# EAGLE board Central Board (EAGLE 8.3.0)
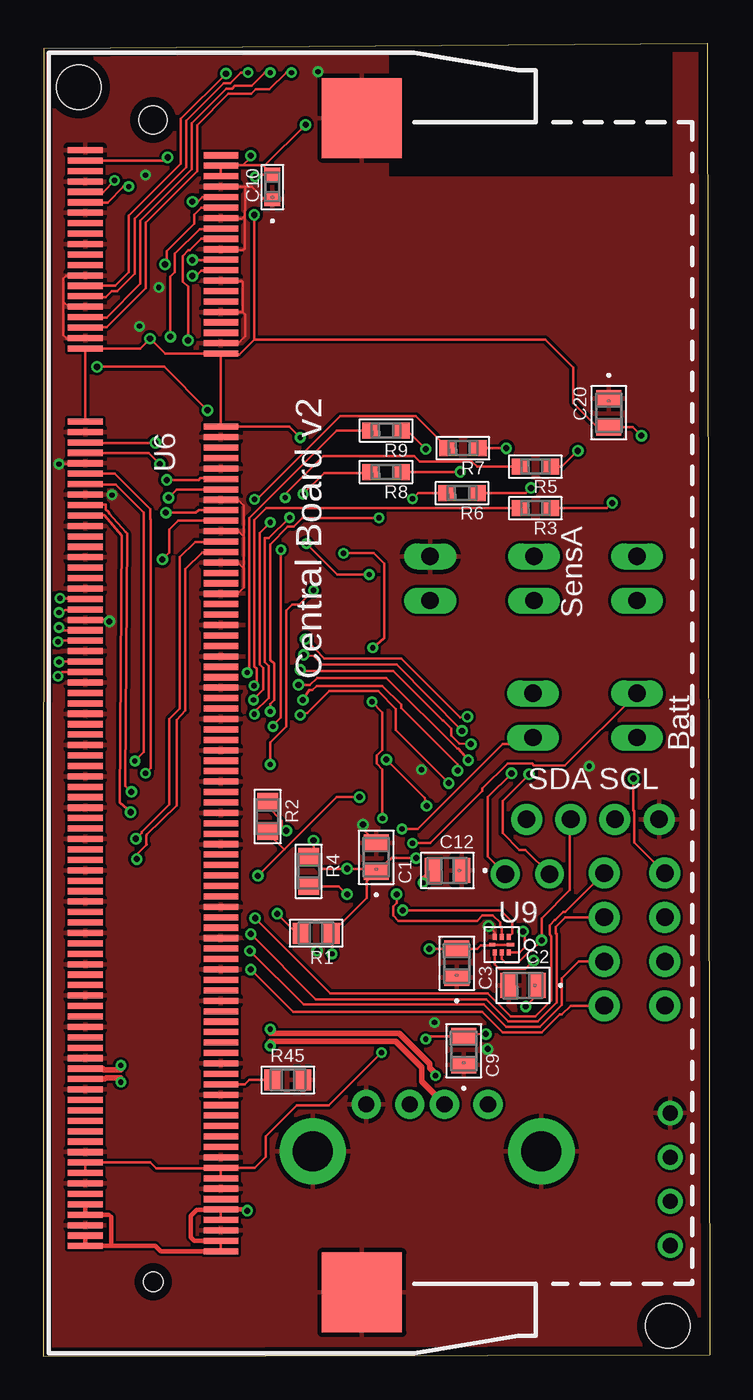
[diagram p0: board, top side]
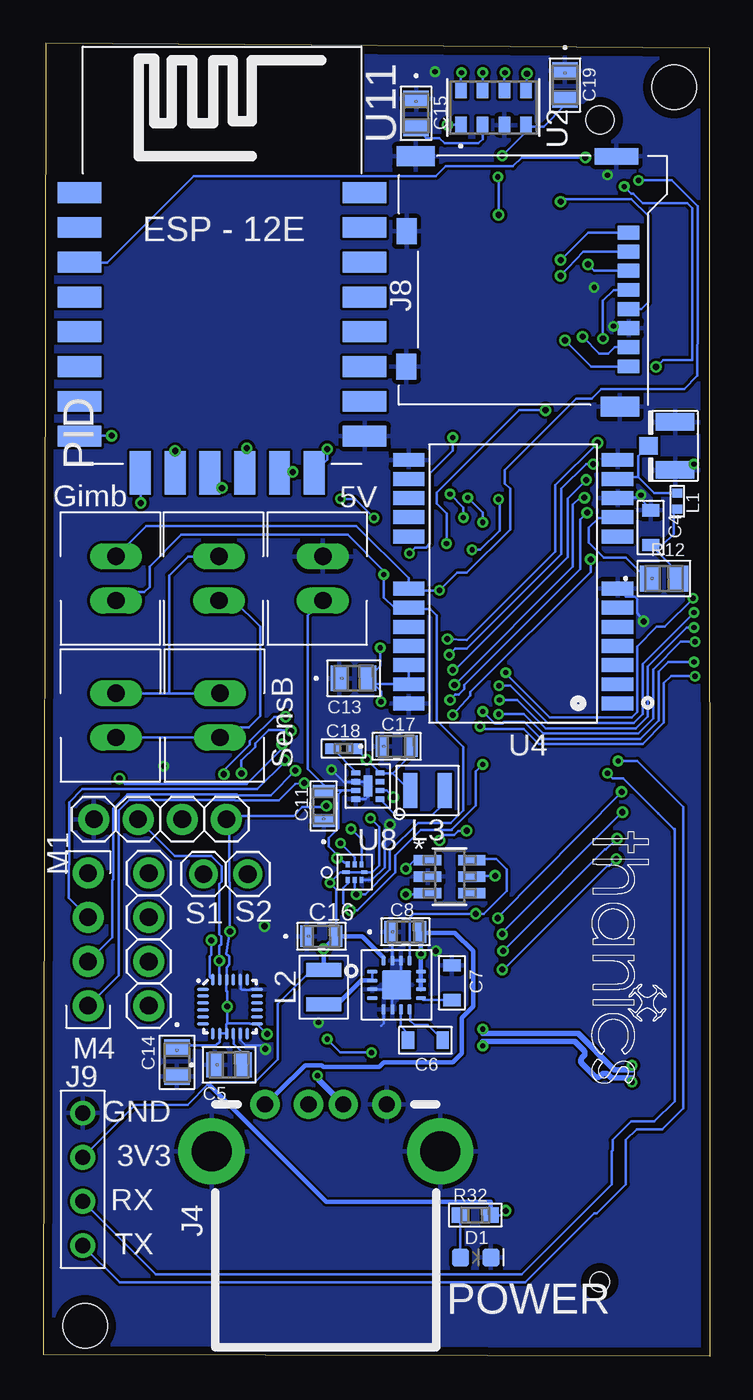
[diagram p1: board, bottom side, seen from below]

Size 38.28 x 75.46 mm. Coordinates in mm from the lower left corner, seen from the top.
Outline: 0,0 38.28,0.08 38.15,75.46 0.03,75.18 0,0
Copper layers (1*16): Top 0.035mm / dielectric 1.6mm / Bottom 0.035mm
Design rules "Elecrow_2-layer_PCB_eagle_rule *": minimum track width 6mil, minimum drill 12mil, track to track 6mil, track to pad 6mil, pad to pad 6mil, via to via 8mil, smd to smd 0mil, copper to edge 20mil, drill to drill 10mil, minimum pad ring 6mil, minimum via ring 6mil, stop-mask expansion 0mil, vias tented up to drill 100mil, thermal gap 10mil
Holes 2.54 mm at 35.89,1.73 2.03,72.95

## Footprints (pad centres in the part's own frame; a part is rotated, then mirrored left to right if it is on the bottom)
0805 = smd 0.965 x 1.448: 1 -0.826,0; 2 0.826,0
0603_CAPACITOR = smd 0.701 x 1.001: 1 -1.001,0; 2 1.001,0
G-21 = smd 0.711 x 1.245: 1 -0.851,0; 2 0.851,0
G-188-M = smd 0.813 x 0.914: 1 -0.699,0; 2 0.699,0
YAG_CC0805 = smd 0.965 x 1.448: 1 -0.826,0; 2 0.826,0
CC0402N-M = smd 0.864 x 0.61: 1 -0.635,0; 2 0.635,0
LED-0603 = smd 1 x 1: A -0.877,0; C 0.877,0
XH_CONNECTOR = drill 1.001 long: 1 -1.27,0; 2 1.27,0
USB_A_RECEPT = drill 0.92 pad 1.676: 1 -3.5,0; 2 -1,0; 3 1,0; 4 3.5,0 | drill 2.3 pad 3.81: 5 -6.57,-2.71; 6 6.57,-2.71
U.FL = smd 2.2 x 1: P$1 0,1.375; P$2 0,-1.375 | smd 1.05 x 1: P$3 1.525,0
MICROSD = smd 0.8 x 1.24: 1 -4.4,0; 2 -3.3,0; 3 -2.2,0; 4 -1.1,0; 5 0,0; 6 1.1,0; 7 2.2,0; 8 3.3,0 | smd 0.95 x 2.5: 9 -8.775,-0.7 | smd 1.15 x 2.2: 10 5.615,-0.5; 11 -8.775,-12.23 | smd 1.5 x 1.15: 12 -4.47,-12.755; 13 3.31,-12.775
4_PIN_TELE_CONNECTOR = drill 0.87 pad 1.422: 1 0,3.81; 2 0,1.27; 3 0,-1.27; 4 0,-3.81
1X02 = drill 1.016 pad 1.651: 1 -1.27,0; 2 1.27,0
1X04 = drill 1.016 pad 1.778: 1 -3.81,0; 2 -1.27,0; 3 1.27,0; 4 3.81,0
0402_INDUCTOR = smd 0.525 x 0.55: P$1 -0.463,0; P$2 0.463,0
470NH_INDUCTOR = smd 0.8 x 2: P$1 -1,0; P$2 1,0
RC0805N = smd 1.006 x 1.2: 1 -0.853,0; 2 0.853,0
RC0603N-M = smd 0.965 x 0.914: 1 -0.876,0; 2 0.876,0
STA_RNCP0805-M = smd 1.118 x 1.499: 1 -0.826,0; 2 0.826,0
QFN40P300X300X105-25N = smd 0.7 x 0.2: 1 -1.55,1; 2 -1.55,0.6; 3 -1.55,0.2; 4 -1.55,-0.2; 5 -1.55,-0.6; 6 -1.55,-1; 13 1.55,-1; 14 1.55,-0.6; 15 1.55,-0.2; 16 1.55,0.2; 17 1.55,0.6; 18 1.55,1 | smd 0.2 x 0.7: 7 -1,-1.55; 8 -0.6,-1.55; 9 -0.2,-1.55; 10 0.2,-1.55; 11 0.6,-1.55; 12 1,-1.55; 19 1,1.55; 20 0.6,1.55; 21 0.2,1.55; 22 -0.2,1.55; 23 -0.6,1.55; 24 -1,1.55
LGA8-M = smd 0.94 x 0.66: 1 -1.003,1.875; 2 -1.003,0.625; 3 -1.003,-0.625; 4 -1.003,-1.875; 5 1.003,-1.875; 6 1.003,-0.625; 7 1.003,0.625; 8 1.003,1.875
MF06A-M = smd 1.575 x 0.584: 1 -1.27,0.953; 2 -1.27,0; 3 -1.27,-0.953; 4 1.27,-0.953; 5 1.27,0; 6 1.27,0.953
NEO-M8 = smd 1.8 x 0.8: 1 6.4,-7.4; 2 6.4,-6.3; 3 6.4,-5.2; 4 6.4,-4.1; 5 6.4,-3; 6 6.4,-1.9; 7 6.4,-0.8; 8 6.4,2.2; 9 6.4,3.3; 10 6.4,4.4; 11 6.4,5.5; 12 6.4,6.6; 13 -5.6,6.6; 14 -5.6,5.5; 15 -5.6,4.4; 16 -5.6,3.3; 17 -5.6,2.2; 18 -5.6,-0.8; 19 -5.6,-1.9; 20 -5.6,-3; 21 -5.6,-4.1; 22 -5.6,-5.2; 23 -5.6,-6.3; 24 -5.6,-7.4
VQFN16 = smd 0.6 x 0.24: 1 -1.4,0.75; 2 -1.4,0.25; 3 -1.4,-0.25; 4 -1.4,-0.75; 9 1.4,-0.75; 10 1.4,-0.25; 11 1.4,0.25; 12 1.4,0.75 | smd 0.24 x 0.6: 5 -0.75,-1.4; 6 -0.25,-1.4; 7 0.25,-1.4; 8 0.75,-1.4; 13 0.75,1.4; 14 0.25,1.4; 15 -0.25,1.4; 16 -0.75,1.4 | smd 1.68 x 1.68: 17 0,0
SO-DIMM = smd 0.35 x 2: 1 -26.4,-3.9; 2 -26.1,3.9; 3 -25.8,-3.9; 4 -25.5,3.9; 5 -25.2,-3.9; 6 -24.9,3.9; 7 -24.6,-3.9; 8 -24.3,3.9; 9 -24,-3.9; 10 -23.7,3.9; 11 -23.4,-3.9; 12 -23.1,3.9; 13 -22.8,-3.9; 14 -22.5,3.9; 15 -22.2,-3.9; 16 -21.9,3.9; 17 -21.6,-3.9; 18 -21.3,3.9; 19 -21,-3.9; 20 -20.7,3.9; 21 -20.4,-3.9; 22 -20.1,3.9; 23 -19.8,-3.9; 24 -19.5,3.9; 25 -19.2,-3.9; 26 -18.9,3.9; 27 -18.6,-3.9; 28 -18.3,3.9; 29 -18,-3.9; 30 -17.7,3.9; 31 -17.4,-3.9; 32 -17.1,3.9; 33 -16.8,-3.9; 34 -16.5,3.9; 35 -16.2,-3.9; 36 -15.9,3.9; 37 -15.6,-3.9; 38 -15.3,3.9; 39 -15,-3.9; 40 -14.7,3.9; 41 -10.8,-3.9; 42 -10.5,3.9; 43 -10.2,-3.9; 44 -9.9,3.9; 45 -9.6,-3.9; 46 -9.3,3.9; 47 -9,-3.9; 48 -8.7,3.9; 49 -8.4,-3.9; 50 -8.1,3.9; 51 -7.8,-3.9; 52 -7.5,3.9; 53 -7.2,-3.9; 54 -6.9,3.9; 55 -6.6,-3.9; 56 -6.3,3.9; 57 -6,-3.9; 58 -5.7,3.9; 59 -5.4,-3.9; 60 -5.1,3.9; 61 -4.8,-3.9; 62 -4.5,3.9; 63 -4.2,-3.9; 64 -3.9,3.9; 65 -3.6,-3.9; 66 -3.3,3.9; 67 -3,-3.9; 68 -2.7,3.9; 69 -2.4,-3.9; 70 -2.1,3.9; 71 -1.8,-3.9; 72 -1.5,3.9; 73 -1.2,-3.9; 74 -0.9,3.9; 75 -0.6,-3.9; 76 -0.3,3.9; 77 0,-3.9; 78 0.3,3.9; 79 0.6,-3.9; 80 0.9,3.9; 81 1.2,-3.9; 82 1.5,3.9; 83 1.8,-3.9; 84 2.1,3.9; 85 2.4,-3.9; 86 2.7,3.9; 87 3,-3.9; 88 3.3,3.9; 89 3.6,-3.9; 90 3.9,3.9; 91 4.2,-3.9; 92 4.5,3.9; 93 4.8,-3.9; 94 5.1,3.9; 95 5.4,-3.9; 96 5.7,3.9; 97 6,-3.9; 98 6.3,3.9; 99 6.6,-3.9; 100 6.9,3.9; 101 7.2,-3.9; 102 7.5,3.9; 103 7.8,-3.9; 104 8.1,3.9; 105 8.4,-3.9; 106 8.7,3.9; 107 9,-3.9; 108 9.3,3.9; 109 9.6,-3.9; 110 9.9,3.9; 111 10.2,-3.9; 112 10.5,3.9; 113 10.8,-3.9; 114 11.1,3.9; 115 11.4,-3.9; 116 11.7,3.9; 117 12,-3.9; 118 12.3,3.9; 119 12.6,-3.9; 120 12.9,3.9; 121 13.2,-3.9; 122 13.5,3.9; 123 13.8,-3.9; 124 14.1,3.9; 125 14.4,-3.9; 126 14.7,3.9; 127 15,-3.9; 128 15.3,3.9; 129 15.6,-3.9; 130 15.9,3.9; 131 16.2,-3.9; 132 16.5,3.9; 133 16.8,-3.9; 134 17.1,3.9; 135 17.4,-3.9; 136 17.7,3.9; 137 18,-3.9; 138 18.3,3.9; 139 18.6,-3.9; 140 18.9,3.9; 141 19.2,-3.9; 142 19.5,3.9; 143 19.8,-3.9; 144 20.1,3.9; 145 20.4,-3.9; 146 20.7,3.9; 147 21,-3.9; 148 21.3,3.9; 149 21.6,-3.9; 150 21.9,3.9; 151 22.2,-3.9; 152 22.5,3.9; 153 22.8,-3.9; 154 23.1,3.9; 155 23.4,-3.9; 156 23.7,3.9; 157 24,-3.9; 158 24.3,3.9; 159 24.6,-3.9; 160 24.9,3.9; 161 25.2,-3.9; 162 25.5,3.9; 163 25.8,-3.9; 164 26.1,3.9; 165 26.4,-3.9; 166 26.7,3.9; 167 27,-3.9; 168 27.3,3.9; 169 27.6,-3.9; 170 27.9,3.9; 171 28.2,-3.9; 172 28.5,3.9; 173 28.8,-3.9; 174 29.1,3.9; 175 29.4,-3.9; 176 29.7,3.9; 177 30,-3.9; 178 30.3,3.9; 179 30.6,-3.9; 180 30.9,3.9; 181 31.2,-3.9; 182 31.5,3.9; 183 31.8,-3.9; 184 32.1,3.9; 185 32.4,-3.9; 186 32.7,3.9; 187 33,-3.9; 188 33.3,3.9; 189 33.6,-3.9; 190 33.9,3.9; 191 34.2,-3.9; 192 34.5,3.9; 193 34.8,-3.9; 194 35.1,3.9; 195 35.4,-3.9; 196 35.7,3.9; 197 36,-3.9; 198 36.3,3.9; 199 36.6,-3.9; 200 36.9,3.9 | smd 4.6 x 4.6: G1 -28.254,12; G2 39.27,12 | hole 1.6: -28.15,0 | hole 1.1: 38.65,0
MLF(ML)_8PIN = smd 0.5 x 0.3: 1 -0.7,0.75; 2 -0.7,0.25; 3 -0.7,-0.25; 4 -0.7,-0.75; 5 0.7,-0.75; 6 0.7,-0.25; 7 0.7,0.25; 8 0.7,0.75 | smd 0.5 x 1.2: EP 0,0
8-UMLP = smd 0.45 x 0.22: 1 -0.5,0 | smd 0.22 x 0.35: 2 -0.4,-0.45; 3 0,-0.45; 4 0.4,-0.45; 6 0.4,0.45; 7 0,0.45; 8 -0.4,0.45 | smd 0.35 x 0.22: 5 0.55,0
ESP12E-SMD = smd 2.5 x 1.2: ADC -8.3,3.8; CH_PD -8.3,1.8; GND 8.1,-8.2; GPIO0 8.1,-2.2; GPIO2 8.1,-4.2; GPIO4 8.1,-0.2; GPIO5 8.1,1.8; GPIO12 -8.3,-4.2; GPIO13 -8.3,-6.2; GPIO14 -8.3,-2.2; GPIO15 8.1,-6.2; GPIO16 -8.3,-0.2; RESET -8.3,5.8; RXD0 8.1,3.8; TXD0 8.1,5.8; VCC -8.3,-8.2 | smd 1.2 x 2.5: CS0 -4.8,-10.3; GPIO9 -0.8,-10.3; GPIO10 1.2,-10.3; MISO -2.8,-10.3; MOSI 3.2,-10.3; SCLK 5.2,-10.3
4_PIN_CONNECTOR = drill 1 pad 1.778: 1 0,3.81; 2 0,1.27; 3 0,-1.27; 4 0,-3.81

## Placement (x,y rotation side)
C1  0.1uF  [0805]  19.13,28.68 90 top
C2  0.1uF  [0805]  27.56,21.31 180 top
C3  0.1uF  [0805]  23.75,22.58 90 top
C4  10nF  [0603_CAPACITOR]  3.38,47.62 270 bottom
C5  0.1uF  [0805]  27.61,16.74 0 bottom
C6  10nF  [0603_CAPACITOR]  16.33,18.16 180 bottom
C7  10nF  [0603_CAPACITOR]  14.81,21.46 270 bottom
C8  10uF  [G-21]  17.48,24.38 0 bottom
C9  0.1uF  [0805]  24.16,17.55 90 top
C10  2.2uF  [G-188-M]  13.16,67.21 90 top
C11  10uF  [G-21]  22.17,31.62 90 bottom
C12  0.1uF  [0805]  23.22,27.91 180 top
C13  0.1uF  [0805]  20.45,38.96 0 bottom
C14  0.1uF  [0805]  30.61,16.89 270 bottom
C15  1uF  [YAG_CC0805]  16.87,71.45 270 bottom
C16  22uF  [G-21]  22.3,24.13 0 bottom
C17  10uF  [G-21]  17.98,35.05 0 bottom
C18  560pF  [CC0402N-M]  21.03,34.92 0 bottom
C19  1uF  [YAG_CC0805]  8.31,73.08 270 bottom
C20  0.1uF  [0805]  32.49,54.23 270 top
D1  GREEN  [LED-0603]  13.44,5.66 0 bottom
J1  POWER_CONNECTOR  [XH_CONNECTOR]  22.23,44.7 90 bottom
J2  I2C_CONNECTOR  [XH_CONNECTOR]  28.19,44.7 90 bottom
J3  I2C_CONNECTOR  [XH_CONNECTOR]  34.11,36.83 90 bottom
J4  USB_A_RECEPT  [USB_A_RECEPT]  22.05,14.48 0 bottom
J5  U.FL  [U.FL]  1.98,52.32 180 bottom
J6  I2C_CONNECTOR  [XH_CONNECTOR]  28.14,36.83 90 bottom
J7  I2C_CONNECTOR  [XH_CONNECTOR]  34.11,44.7 90 bottom
J8  MICROSD  [MICROSD]  4.65,60.2 270 bottom
J9  4_PIN_TELE_CONNECTOR  [4_PIN_TELE_CONNECTOR]  36.02,10.16 180 bottom
JP1  [1X02]  27.81,27.71 0 bottom
JP2  [1X04]  32.23,23.95 270 bottom
JP3  [1X04]  31.57,30.86 180 bottom
L1  27 nH  [0402_INDUCTOR]  1.85,49.15 270 bottom
L2  470nH  [470NH_INDUCTOR]  22.17,21.21 90 bottom
L3  470nH  [470NH_INDUCTOR]  16.21,32.51 180 bottom
R1  10k  [RC0805N]  15.67,24.31 180 top
R2  10k  [RC0805N]  12.88,31.01 270 top
R3  20R  [RC0603N-M]  28.27,48.74 180 top
R4  10k  [RC0805N]  15.24,27.86 270 top
R5  20R  [RC0603N-M]  28.27,51.13 180 top
R6  20R  [RC0603N-M]  24.05,49.61 180 top
R7  20R  [RC0603N-M]  24.1,52.2 180 top
R8  20R  [RC0603N-M]  19.69,50.83 180 top
R9  20R  [RC0603N-M]  19.69,53.21 180 top
R12  10  [STA_RNCP0805-M]  2.62,44.7 0 bottom
R32  20R  [RC0603N-M]  13.46,8.1 0 bottom
R45  10k  [RC0805N]  14.05,15.88 0 top
U1  [QFN40P300X300X105-25N]  27.56,20.09 0 bottom
U2  [LGA8-M]  12.42,71.78 90 bottom
U3  LM3880MF-1AA/NOPBMF06A-M  [MF06A-M]  14.94,27.56 0 bottom
U4  NEO-M8  [NEO-M8]  11.68,44.92 0 bottom
U5  TPS6209  [VQFN16]  17.98,21.34 0 bottom
U6  [SO-DIMM]  6.3,42.93 270 top
U7  MIC23050  [MLF(ML)_8PIN]  19.63,32.77 180 bottom
U8  [8-UMLP]  20.4,27.81 0 bottom
U9  [8-UMLP]  26.34,23.65 180 top
U11  [ESP12E-SMD]  27.91,61.09 0 bottom
U$12  4_PIN_CONNECTOR  [4_PIN_CONNECTOR]  35.71,23.95 0 bottom

## Library data of the parts
C1-C3 C5 C9 C12-C14 C20 = 0.1uF X7R Ceramic Capacitor; COPYRIGHT: Copyright C 2015 Accelerated Designs. All rights reserved; MANUFACTURER_PART_NUMBER: 08055C104KAT2A; VENDOR: Vendor
C4 C6 C7 J1-J4 J6-J9 L1-L3 U5 U7-U9 U$12 = thanics_robotics
C8 C11 C17 = 10uF X5R Ceramic Capacitor; COPYRIGHT: Copyright C 2015 Accelerated Designs. All rights reserved; MANUFACTURER_PART_NUMBER: GRM21BR60J106ME19L; VENDOR: Vendor
C10 = 2.2uF X5R Capacitor; COPYRIGHT: Copyright C 2015 Accelerated Designs. All rights reserved; MANUFACTURER_PART_NUMBER: GRM188R61C225KE15J; VENDOR: Vendor
C15 C19 = 1uF X7R Ceramic Capacitor; COPYRIGHT: Copyright C 2015 Accelerated Designs. All rights reserved; MANUFACTURER_PART_NUMBER: CC0805KKX7R7BB105; VENDOR: Vendor
C16 = 22uF X5R Ceramic Capacitor; COPYRIGHT: Copyright C 2015 Accelerated Designs. All rights reserved; MANUFACTURER_PART_NUMBER: GRM21BR60J226ME39L; VENDOR: Vendor
C18 = 560pF-capacitor; MANUFACTURER_PART_NUMBER: CC0402KRX7R9BB561; VENDOR: Yageo
D1 = SparkFun-LED; PROD_ID: DIO-00821
J5 = SparkFun-Connectors; PROD_ID: CONN-09193; SF_ID: WRL-09144
JP1-JP3 = pinhead
R1 R2 R4 R45 = 10k-resistor; CASE: 0805 2012 metric; COMPOSITION: Thin Film; COPYRIGHT: Copyright C 2015 Accelerated Designs. All rights reserved; DATASHEET: httpindustrial.panasonic.comwwwcgijvcr13pz.cgi?E+PZ+3+AOA0026+ERA6AEB103V+7+WW; DIGIKEYPARTNUMBER: P10KDATRND; HEIGHT: 0.024" 0.60mm; LEADSTYLE: Surface Mount SMD SMT; MANUFACTURER_PART_NUMBER: ERA6AEB103V; NUMBEROFTERMINATIONS: 2; PACKAGECASE: 0805 2012 Metric; PACKAGING: Tape &amp Reel TR; POWERWATTS: 0.125W 18W; QUANTITY_AVAILABLE: 225000; RESISTANCEINOHMS: 10.0K; RESISTANCEOHMS: 10K; SIZEDIMENSION: 0.079" L x 0.049" W 2.00mm x 1.25mm; TEMPERATURECOEFFICIENT: 25ppm°C; TOLERANCE: 0.1%; VENDOR: Panasonic; VOLTAGEWORKING: 100V
R3 R5-R9 R32 = 20-resistor; MANUFACTURER_PART_NUMBER: RC0603JR0720RL; VENDOR: Yageo
R12 = 10-resistor; COPYRIGHT: Copyright C 2015 Accelerated Designs. All rights reserved; MANUFACTURER_PART_NUMBER: RNCP0805FTD10R0; VENDOR: Vendor
U1 = ICM-20948-mpu
U2 = mpl115a1-barometer; MANUFACTURER_PART_NUMBER: mpl115a1; VENDOR: Freescale
U3 = LM3880MF; MANUFACTURER_PART_NUMBER: lm3880mf1aaNOPB; VENDOR: National Semiconductor
U4 = ubloxLib
U6 = raspberrypi_cm
U11 = esp8266modules

## Nets
1.8V: C2.1 C9.2 C14.1 C17.2 C18.2 JP3.1 L3.P$2 U1.8 U1.9 U1.13 U1.22 U6.183 U6.184 U6.185 U6.186 U7.4 U9.8
+3V3: C3.2 C10.2 C12.2 C13.2 C16.2 C19.2 C20.2 J8.4 J9.3 L2.P$2 R32.2 U2.1 U2.4 U4.22 U4.23 U5.16 U6.4 U6.6 U6.39 U6.40 U6.41 U6.42 U6.191 U6.192 U6.193 U6.194 U6.197 U6.198 U6.199 U6.200 U8.1 U8.5 U9.1 U9.5 U11.VCC
+5V: C1.1 C8.2 C11.2 J1.1 J4.1 R1.1 R2.1 R4.1 U3.1 U5.10 U5.11 U5.12 U7.7 U8.8
EMMC_DISABLE_N: U6.2
GND: C1.2 C2.2 C3.1 C4.1 C5.1 C7.1 C8.1 C9.1 C10.1 C11.1 C12.1 C13.1 C14.2 C15.1 C16.1 C17.1 C19.1 C20.1 D1.C J1.2 J4.4 J4.5 J4.6 J5.P$1 J5.P$2 J8.6 J8.9 J8.10 J8.11 J8.12 J8.13 J9.4 JP3.4 R45.2 U1.11 U1.18 U1.20 U2.3 U3.2 U4.7 U4.10 U4.12 U4.13 U4.24 U5.3 U5.5 U5.6 U5.14 U5.15 U5.17 U6.1 U6.7 U6.8 U6.13 U6.14 U6.19 U6.20 U6.25 U6.26 U6.31 U6.32 U6.37 U6.38 U6.43 U6.44 U6.49 U6.50 U6.55 U6.56 U6.61 U6.62 U6.67 U6.68 U6.73 U6.74 U6.79 U6.80 U6.85 U6.86 U6.91 U6.92 U6.97 U6.98 U6.103 U6.104 U6.109 U6.110 U6.115 U6.116 U6.121 U6.122 U6.127 U6.133 U6.134 U6.139 U6.140 U6.145 U6.146 U6.151 U6.152 U6.157 U6.163 U6.164 U6.169 U6.170 U6.181 U6.182 U6.187 U6.188 U6.195 U6.196 U6.G1 U6.G2 U7.6 U7.8 U7.EP U8.4 U9.4 U11.GND
I2C_SCL: J7.1 U4.19 U6.11 U8.3 U9.3
I2C_SCL_1V8: JP3.3 U1.23 U9.6
I2C_SCL_5V: J2.1 J3.1 J6.1 U8.6
I2C_SDA: J7.2 U4.18 U6.9 U8.2 U9.2
I2C_SDA_1V8: JP3.2 U1.24 U9.7
I2C_SDA_5V: J2.2 J3.2 J6.2 U8.7
ID_SD: U6.3 U11.CH_PD
LED1: JP2.1 U6.57
LED2: JP2.2 U6.59
LED3: JP2.3 U6.64
LED4: JP2.4 U6.66
MOTOR1: U6.52 U$12.1
MOTOR2: U6.54 U$12.2
MOTOR3: U6.58 U$12.3
MOTOR4: U6.60 U$12.4
N$1: J5.P$3 L1.P$1 U4.11
N$2: C6.2 U5.7
N$3: C6.1 U5.8
N$4: D1.A R32.1
N$5: R1.2 U3.6 U5.13
N$6: R2.2 U3.5 U7.2
N$7: R3.1 U11.CS0
N$8: R5.1 U11.MISO
N$9: R6.1 U11.GPIO9
N$10: R7.1 U11.GPIO10
N$11: C5.2 U1.10
N$12: C15.2 U2.2
N$13: R12.1 U4.9
N$14: R8.1 U11.MOSI
N$15: R9.1 U11.SCLK
N$26: C4.2 L1.P$2 R12.2
N$29: C7.2 U5.9
N$30: L2.P$1 U5.1 U5.2
N$32: L3.P$1 U7.1
N$48: C18.1 U7.5
N$53: R45.1 U6.168
POWER_SEQ_EN: R4.2 U3.3
SD_CLK: R9.2 U6.75
SD_CMD: R3.2 U6.77
SD_D0: R5.2 U6.81
SD_D1: R8.2 U6.83
SD_D2: R6.2 U6.87
SD_D3: R7.2 U6.89
SDX_CLK: J8.5 U6.10
SDX_CMD: J8.3 U6.12
SDX_D0: J8.7 U6.16
SDX_D1: J8.8 U6.18
SDX_D2: J8.1 U6.22
SDX_D3: J8.2 U6.24
SERVO1: JP1.1 U6.45
SERVO2: JP1.2 U6.47
SPI_CS0: U2.5 U6.27
SPI_CS1: U6.23
SPI_MISO: U2.6 U6.29
SPI_MOSI: U2.7 U6.33
SPI_SCLK: U2.8 U6.35
UART2_RX: U6.72
UART2_TX: U6.70
UART_RX: J9.1 U6.53
UART_TX: J9.2 U6.51
USB_D_N: J4.2 U6.167
USB_D_P: J4.3 U6.165

## Tracks (layer width: path | path; a pad name or v marks a point on that pad's centre or on a via)
1.8V  (via drill 0.3, 0.35)
  Top 0.152: U6.185 U6.183 6.15,11.13 6.48,10.79 10.17,10.79 U6.184 | U6.186 U6.184 | v25.43,18.52 24.85,18.48 C9.2 22.14,18.38 v21.97,18.21 | C2.1 28.38,20.76 v27.72,20.09 | U9.8 27.36,23.2 27.66,23.49 27.66,24.31 v27.56,24.41 | v22.02,31.62 21.92,32.08 v19.71,34.29 | U6.184 12.15,10.83 12.78,11.45 12.78,12.62 14.55,14.4 16.38,14.4 v19.43,17.45
  Bottom 0.152: L3.P$2 17.22,32.51 18.21,33.5 | 18.21,33.5 18.92,33.5 U7.4 v19.71,34.29 20.34,34.92 C18.2 | 18.21,33.5 17.13,34.58 C17.2 17.11,35.08 | v25.43,18.52 U1.13 26.39,19.09 26.42,19.12 27.72,19.12 | C14.1 30.47,17.86 28.37,17.86 28.16,18.07 U1.8 U1.9 27.76,19.07 27.72,19.12 | 27.72,19.12 v27.72,20.09 27.72,20.96 27.76,21.01 U1.22 27.76,22.36 27.61,22.5 27.61,22.96 27.76,23.11 v27.56,24.41 27.56,27.24 | v22.02,31.62 22.02,31.57 23.39,31.57 23.9,31.06 27.56,31.06 JP3.1 27.6,30.7 27.6,27.27 | v19.43,17.45 21.21,17.45 v21.97,18.21 | 27.56,27.24 27.6,27.27 | 27.56,27.24 27.6,27.27
+3V3  (via drill 0.3, 0.35)
  Top 0.152: U6.194 U6.192 10.18,8.41 9.47,8.41 | 2.4,6.83 U6.197 | U6.198 U6.200 | 8.81,8.41 8.92,8.41 | v11.91,69.01 11.91,68.91 11.46,68.45 | 11.46,68.45 10.23,68.45 U6.4 U6.6 | 11.46,68.45 12.61,68.45 | 12.61,68.45 C10.2 12.28,67.91 v12.17,67.79 | 12.61,68.45 12.73,68.45 v15.06,70.79 | U6.40 6.99,57.63 v6.12,58.5 5.55,57.93 U6.39 U6.41 | 12.12,58.45 11.25,57.58 10.24,57.58 U6.40 | U6.40 U6.42 14.14,53.43 v14.76,52.81 | v18.92,40.72 19.58,41.27 19.58,45.55 18.98,46.15 v17.25,46.15 | v21.82,27.2 21.82,27.55 C12.2 | v18.87,37.62 19.48,37.01 19.48,34.85 19.15,34.52 19.15,34.06 19.48,33.73 v19.48,30.91 | U9.1 U9.5 25.74,23.6 25.73,23.6 25.12,23.6 24.93,23.41 C3.2 v22.17,23.41 | 12.12,58.45 v12.12,65.61 | 12.12,58.45 28.83,58.45 30.45,56.82 30.45,54.79 31.84,53.4 C20.2 33.87,53.4 v34.37,52.91
  Top 0.254: U6.192 11.64,8.43 v11.71,8.36 | U6.198 8.67,6.63 8.46,6.83 8.46,8.05 8.81,8.41 | 8.92,8.41 9.47,8.41 | U6.200 6.73,6.03 6.43,6.33 3.89,6.33 | 3.89,6.33 U6.199 2.4,6.83 | 3.89,6.33 3.89,8 3.76,8.13 U6.193 U6.191
  Bottom 0.152: 18.73,22.9 U5.16 | R32.2 11.96,8.1 v11.71,8.36 | C19.2 8.31,71.91 9.53,70.69 10.46,70.69 U2.4 10.55,70.38 v11.91,69.01 | v15.06,70.79 U2.1 | v6.12,58.5 6.12,60.68 5.51,61.29 J8.4 | C13.2 19.28,38.62 U4.23 U4.22 | v18.92,40.72 18.92,39.66 C13.2 | C16.2 21.45,26.83 v21.82,27.2 21.21,27.81 U8.1 U8.5 19.38,27.81 18.97,28.22 18.97,30.4 v19.48,30.91 | v18.87,37.62 18.87,38.21 C13.2 | v12.12,65.61 12.12,67.74 v12.17,67.79 | L2.P$2 22.85,22.21 24.82,20.24 24.82,17.04 26.14,15.72 28.73,15.72 28.8,15.65 30,14.45 32.99,14.45 J9.3 | v34.37,52.91 36.19,52.91 U11.VCC | v14.76,52.81 14.76,52.04 16.08,50.72 16.08,46.71 16.29,46.49 16.9,46.49 v17.25,46.15
  Bottom 0.254: R32.2 12.59,8.86 22.02,8.86 28.8,15.65 | 18.73,22.9 19.96,24.13 C16.2 v22.17,23.41 L2.P$2
+5V  (via drill 0.3, 0.35)
  Top 0.152: C1.1 18.96,28.02 v17.45,28.02 15.94,28.02 R4.1 15.52,29 v15.52,29.64 | v21.41,28.63 20,28.63 C1.1 | C1.1 18.57,27.29 18.57,26.35 R1.1 16.58,24.25 v16.58,23.12 | v13.96,30.2 13.71,30.45 13.71,30.76 12.88,31.59 R2.1
  Bottom 0.152: 21.11,32.52 U7.7 | 21.11,32.52 22.13,32.52 C11.2 22.17,32.84 23.09,33.76 23.09,42.57 J1.1 | U3.1 16.95,28.51 v17.45,28.02 | U8.8 v21.41,28.63 21.41,28.83 21.87,29.29 21.87,29.78 21.32,30.32 21.32,32.3 21.11,32.52 | v13.96,30.2 14.43,30.2 14.68,29.95 15.21,29.95 v15.52,29.64 | 16.58,22.99 v16.58,23.12
  Bottom 0.254: U5.10 U5.11 U5.12 16.58,22.99 | J4.1 23.49,16.45 23.23,16.71 22.29,16.71 22.21,16.64 18.97,16.64 18.72,16.89 14.76,16.89 14.25,17.4 14.25,19.43 13.59,20.09 13.59,23.29 14.63,24.33 16.57,24.33 C8.2 16.58,24.34 v16.58,23.12
GND  (via drill 0.3, 0.35)
  Top 0.152: U6.38 11.19,58.23 11.61,58.65 11.61,59.87 11.46,60.02 | 11.46,60.02 U6.32 | U6.8 11.61,67.23 | 11.61,67.23 11.97,67.23 12.62,66.57 13.09,66.57 C10.1 | 11.46,60.02 11.46,61.75 11.4,61.8 10.23,61.8 U6.26 | v18.36,30.56 18.36,30.26 C1.2 | 11.61,67.23 11.61,65.89 11.56,65.84 11.56,65.56 | 11.56,65.56 11.4,65.41 10.22,65.41 U6.14 | 11.56,65.56 11.56,63.68 11.46,63.58 10.25,63.58 U6.20 | U9.4 25.94,24.35 v25.58,24.71 | U6.79 3.7,42.33 v3.78,42.24 | U6.25 1.32,62.13 1.14,61.95 1.14,60.63 | 1.14,60.63 1.5,60.27 2.35,60.27 U6.31 | 1.14,60.63 1.14,58.7 1.35,58.5 2.37,58.5 U6.37 | U6.74 11.16,43.83 11.51,44.17 11.51,45.29 | 11.51,45.29 11.2,45.59 10.23,45.59 U6.68 | 11.51,45.29 11.51,47.12 | 11.51,47.12 11.2,47.42 U6.62 | 11.51,47.12 11.51,48.9 11.15,49.25 10.22,49.25 U6.56 | v0.89,51.28 2.36,51.28 U6.49
  Bottom 0.152: U7.8 19.75,32.02 19.63,32.13 U7.EP 19.88,33.02 U7.6 21.03,33.02 v21.72,33.71 | U5.6 18.23,21.09 | U5.3 18.23,21.09 | 18.23,21.09 U5.17 17.73,21.59 U5.14 U5.15 18.23,24.29 C8.1 | C4.1 3.38,48.69 4.04,49.35 5.26,49.35 U4.10 | J8.6 5.4,59.1 v5.51,59.21 | U1.18 26.39,21.09 26.42,21.06 26.85,21.06 26.9,21.11 26.95,21.11 U1.20 | U1.11 26.96,18.17 26.64,17.86 25.73,17.86 v25.53,17.65 | U8.4 19.4,27.36 18.67,28.09 18.67,30.25 v18.36,30.56 | v3.78,42.24 4.15,42.71 4.15,43.52 4.29,43.65 4.81,43.65 U4.7 | 18.87,18.97 18.72,19.13 18.72,19.92 U5.5 | J5.P$1 1.22,50.95 v0.89,51.28
  other vias: 31.37,33.91 22.48,19.18 6.63,61.44 5.87,67.89 3.94,49.5 15.77,73.84 15.72,23.29
  pour Top: 0.03,75.11 38.18,75.46 38.38,0.13 0.03,0.08
  pour Bottom: 0.08,75.16 38.28,75.41 38.38,0.08 0.08,0.03
I2C_SCL  (via drill 0.3, 0.35)
  Top 0.152: v4.9,67.23 4.6,67.23 3.68,66.32 2.41,66.32 U6.11 | v3.07,56.87 6.93,56.87 v9.42,54.38 | v20.29,26.54 20.29,26.06 20.09,25.86 20.09,25.32 20.4,25.02 24.92,25.02 25.22,25.32 25.83,25.32 26.24,24.92 26.24,24.77 26.34,24.66 U9.3 | v18.72,44.93 16.89,44.93 v15.11,46.71
  Bottom 0.152: J7.1 33.63,43.92 32.49,43.92 32.18,44.22 32.18,45.39 30.35,47.22 20.8,47.22 18.72,45.14 v18.72,44.93 18.72,43.61 18.13,43.02 U4.19 17.21,42.95 16.06,42.95 15.67,42.56 15.67,36.55 14.15,35.03 14.15,31.37 14.86,30.66 16.74,30.66 18.36,29.03 18.36,27.97 19.79,26.54 v20.29,26.54 20.29,26.75 20.4,26.85 U8.3 | v4.9,67.23 4.5,66.83 4.37,66.83 3.82,66.28 1.28,66.28 1,65.99 1,57.27 2.67,57.27 v3.07,56.87 | v15.11,46.71 15.11,48.44 15.67,49 15.67,49.66 10.95,54.38 v9.42,54.38
I2C_SCL_1V8  (via drill 0.35)
  Top 0.152: U9.6 25.94,22.52 26.2,22.26 27.7,22.26 v28.17,22.73
  Bottom 0.152: U1.23 v28.17,22.73 28.17,23.57 28.07,23.67 28.07,24.13 28.17,24.23 28.17,27.13 28.03,27.27 28.03,28.15 28.65,28.77 30.75,28.77 JP3.3
I2C_SCL_5V  (via drill 0.3)
  Top 0.152: v20.6,30.3 21.51,30.3 26.39,35.18 27.76,35.18 J6.1
  Bottom 0.152: 28.63,35.56 J3.1 | 28.63,35.56 J6.1 | J2.1 27.33,43.43 25.83,41.93 25.83,36.8 26.49,36.14 28.04,36.14 28.63,35.56 | U8.6 20,29.7 v20.6,30.3
I2C_SDA  (via drill 0.3, 0.35)
  Top 0.152: 1.5,66.93 U6.9 3.43,66.93 v4.09,67.59 | 15.62,44.02 15.57,43.97 v15.52,44.02 14.71,43.2 14.3,43.2 13.94,42.85 13.94,36.2 13.03,35.29 v13.03,34.01 | U9.2 26.95,24.31 26.95,24.97 26.29,25.63 v20.65,25.63
  Bottom 0.152: J7.2 32.36,47.73 20.29,47.73 17.28,44.71 U4.18 17.18,44.02 v15.52,44.02 14.5,45.03 13.94,45.03 11.46,47.52 11.46,49.86 11.76,50.16 11.76,50.93 7.65,55.04 6.78,55.04 6.22,55.6 1.45,55.6 0.69,56.36 0.69,56.41 | v4.09,67.59 2.16,67.59 0.69,66.12 0.69,59.95 0.69,56.41 | U8.2 20.8,27.16 21.06,26.9 21.06,26.03 v20.65,25.63 20.24,25.63 18.06,27.81 18.06,28.78 16.59,30.25 14.81,30.25 14.81,30.28 13.44,31.65 13.44,33.6 v13.03,34.01 | 0.69,56.41
I2C_SDA_1V8  (via drill 0.35)
  Top 0.152: U9.7 26.34,22.83 26.54,22.63 27.28,22.63 27.94,23.29 28.01,23.29 v28.63,23.9 28.63,25.17 30.25,26.8 30.25,30.81 JP3.2
  Bottom 0.152: v28.63,23.9 28.63,23.06 28.72,22.96 28.72,21.81 U1.24
I2C_SDA_5V  (via drill 0.3)
  Top 0.152: v21.21,29.49 22.23,29.49 25.23,32.49 25.23,32.62 26.67,34.06 28.09,34.06 28.19,33.96 29.97,33.96 J3.2
  Bottom 0.152: 31.12,38.1 J3.2 | 31.12,38.1 J6.2 | J2.2 29.97,45.97 31.06,44.88 31.06,38.15 31.12,38.1 | U8.7 20.4,28.68 v21.21,29.49
ID_SD  (via drill 0.35)
  Top 0.152: U6.3 6.95,68.73 v7.14,68.91
  Bottom 0.152: v7.14,68.91 10.8,68.91 11.3,68.4 15.16,68.4 15.72,67.84 29.64,67.84 34.62,62.87 36.19,62.87 U11.CH_PD
LED1  (via drill 0.35)
  Top 0.152: v12.17,25.17 16.48,20.85 25.53,20.85 26.85,19.53 28.27,19.53 29.18,20.44 29.18,24.13 29.08,24.23 29.08,24.77 29.39,25.07 29.41,25.07 29.87,25.53 30,25.53 JP2.1 | U6.57 2.42,48.95 3.58,48.95 3.58,48.68 3.71,48.55 3.78,48.46 3.78,48.45 4.72,47.37 4.8,47.29 4.8,47.28 4.81,47.27 4.8,47.16 4.71,33.09 4.71,32.78 v5.05,32.44
  Bottom 0.152: v12.17,25.17 12.17,25.22 v5.05,32.44
LED2  (via drill 0.35)
  Top 0.152: JP2.2 30,25.22 29.44,24.66 29.44,24.31 29.49,24.26 29.49,20.32 28.4,19.23 26.72,19.23 25.44,20.51 15.66,20.51 v11.91,24.26 | v5,31.27 4.39,31.83 4.5,47.17 3.48,48.34 2.41,48.34 U6.59
  Bottom 0.152: v11.91,24.26 11.91,24.36 v5,31.27
LED3  (via drill 0.35)
  Top 0.152: JP2.3 30.76,22.68 29.79,21.71 29.79,20.19 28.52,18.92 26.6,18.92 25.31,20.21 14.95,20.21 v11.86,23.29 | U6.64 10.19,46.81 8.71,46.81 7.84,45.94 7.84,37.22 7.24,36.63 7.24,31.73 5.64,30.12 5.64,30.07 v5.31,29.74
  Bottom 0.152: v11.86,23.29 6.02,29.13 5.97,29.13 v5.31,29.74
LED4  (via drill 0.35)
  Top 0.152: JP2.4 30.3,20.14 29.79,19.63 29.67,19.63 28.65,18.62 26.39,18.62 25.22,19.79 14.35,19.79 v11.91,22.22 | v5.36,28.57 5.36,28.83 5.92,29.39 | 5.92,29.39 5.94,29.41 | U6.66 10.18,46.2 9.12,46.2 8.15,45.24 8.15,37.11 7.66,36.56 7.66,31.66 5.94,30 5.94,29.95 5.92,29.92 5.92,29.39
  Bottom 0.152: v11.91,22.22 11.81,22.22 5.87,28.17 5.77,28.17 v5.36,28.57
MOTOR1  (via drill 0.35)
  Top 0.152: v24.56,35.18 23.9,35.23 23.44,35.69 23.44,36.09 22.99,36.55 22.94,36.55 20.09,39.4 14.81,39.4 v14.76,39.45 | v7.09,50.37 8.92,50.37 9.02,50.47 10.16,50.47 U6.52 | v33.91,33.2 33.91,31.37 33.96,31.32 33.96,29.52 U$12.1
  Bottom 0.152: U$12.1 35.43,27.76 | v14.76,39.45 14.66,39.45 8.15,45.95 8.15,49.3 v7.09,50.37 | v24.56,35.18 24.56,34.92 26.59,32.89 33.6,32.89 v33.91,33.2
MOTOR2  (via drill 0.35)
  Top 0.152: U6.54 7.66,49.83 v7.19,49.35 | v14.66,38.58 15.32,38.58 15.72,38.99 19.71,38.99 23.78,34.92 23.85,34.92 v24.41,34.26
  Bottom 0.152: v7.19,49.35 7.44,49.35 7.85,48.95 7.85,45.39 v14.66,38.58 | v24.41,34.26 24.41,34.16 25.98,32.59 36.04,32.59 36.8,31.83 36.8,28.25 36.83,28.22 36.83,26.34 U$12.2
MOTOR3  (via drill 0.35)
  Top 0.152: v23.8,33.65 23.8,34.01 20.55,37.26 20.55,37.46 19.48,38.53 15.7,38.53 15.44,38.28 15.27,38.28 v14.91,37.72 | v7.04,48.49 8.76,48.49 8.92,48.64 10.18,48.64 U6.58
  Bottom 0.152: v14.91,37.72 14.6,38.03 14.43,38.03 14.1,38.35 14.1,38.58 7.44,45.24 7.44,48.08 v7.04,48.49 | U$12.3 34.32,24.08 34.32,27.36 34.26,27.41 34.26,31.49 33.48,32.28 27.17,32.28 27.12,32.23 25.22,32.23 v23.8,33.65
MOTOR4  (via drill 0.35)
  Top 0.152: U6.60 7.74,48.03 7.24,47.52 7.24,46.2 v6.83,45.8 | v14.76,36.85 15.16,36.96 16.43,38.23 19.23,38.23 20.24,37.21 20.24,35.99 v23.29,32.94
  Bottom 0.152: v6.83,45.8 6.83,45.09 13.74,38.18 13.74,37.97 v14.76,36.85 | v23.29,32.94 23.8,32.89 24.77,31.93 27.25,31.93 27.3,31.98 33.35,31.98 33.96,31.37 33.96,21.89 U$12.4
N$1
  Bottom 0.152: L1.P$1 3.18,49.61 4.09,50.52 | 4.09,50.52 5.19,50.52 U4.11 | 4.09,50.52 4.09,51.74 J5.P$3
N$2
  Bottom 0.152: C6.2 17.33,18.55 17.75,18.97 17.75,19.91 U5.7
N$3
  Bottom 0.152: C6.1 15.33,18.18 16.18,19.02 16.94,19.02 17.2,19.28 17.2,19.9 U5.8
N$4
  Bottom 0.152: R32.1 14.34,5.69 D1.A
N$5  (via drill 0.35)
  Top 0.152: R1.2 14.55,24.31 v13.44,25.42
  Bottom 0.152: U5.13 17.23,25.18 16.99,25.42 v13.44,25.42 12.98,25.42 11.66,26.75 11.66,27.96 12.27,28.57 13.6,28.57 U3.6
N$6  (via drill 0.35)
  Top 0.152: v18.16,32.13 16.84,32.13 13.83,29.12 | 13.83,29.12 v12.32,27.61 | R2.2 12.88,30.08 13.83,29.12
  Bottom 0.152: U7.2 18.55,32.52 v18.16,32.13 | v12.32,27.61 13.61,27.61 U3.5
N$7  (via drill 0.35)
  Top 0.152: R3.1 32.39,48.74 v32.69,49.05
  Bottom 0.152: v32.69,49.05 32.69,50.76 U11.CS0
N$8  (via drill 0.35)
  Top 0.152: R5.1 29.79,51.13 v30.71,52.04
  Bottom 0.152: v30.71,52.04 U11.MISO
N$9  (via drill 0.35)
  Top 0.152: R6.1 27.71,49.61 v28.02,49.91
  Bottom 0.152: v28.02,49.91 28.02,50.09 U11.GPIO9
N$10  (via drill 0.35)
  Top 0.152: R7.1 v26.59,52.2
  Bottom 0.152: v26.59,52.2 26.59,50.91 U11.GPIO10
N$11
  Bottom 0.152: C5.2 26.78,17.39 27.36,17.96 U1.10
N$12
  Bottom 0.152: U2.2 13.05,69.96 13.28,69.72 15.21,69.72 15.52,70.03 16.27,70.03 C15.2
N$13
  Bottom 0.152: R12.1 3.61,44.7 4.8,45.9 6.07,45.9 6.93,46.76 6.93,47.62 6.38,48.18 5.32,48.18 U4.9
N$14  (via drill 0.35)
  Top 0.152: R8.1 v23.95,50.82
  Bottom 0.152: v23.95,50.82 24.68,50.82 U11.MOSI
N$15  (via drill 0.35)
  Top 0.152: R9.1 20.9,53.21 v21.97,52.15
  Bottom 0.152: v21.97,52.15 21.97,51.53 U11.SCLK
N$26
  Bottom 0.152: R12.2 1.79,45.04 C4.2 2.7,46.62 2.06,47.27 2.06,48.48 L1.P$2
N$29
  Bottom 0.152: C7.2 16.46,20.46 U5.9
N$30
  Bottom 0.152: 21.4,20.21 L2.P$1 | U5.1 U5.2
  Bottom 0.254: U5.2 20.02,21.59 21.4,20.21
N$32
  Bottom 0.152: U7.1 18.93,31.99 18.06,31.11 15.93,31.11 15.32,31.73 15.32,32.4 L3.P$1
N$48
  Bottom 0.152: U7.5 20.33,33.59 C18.1
N$53
  Top 0.152: R45.1 11.81,15.88 11.56,15.62 U6.168
POWER_SEQ_EN  (via drill 0.35)
  Top 0.152: R4.2 16.98,27.01 v17.45,26.54
  Bottom 0.152: v17.45,26.54 16.27,26.54 U3.3
SD_CLK  (via drill 0.3)
  Top 0.152: R9.2 16.84,53.21 11.81,48.18 11.81,39.4 v11.71,39.29 | v0.94,43.56 2.36,43.56 U6.75
  Bottom 0.152: v11.71,39.29 11.71,39.24 9.17,36.7 4.48,36.7 4.15,37.03 4.15,40.8 3.02,41.93 2.57,41.93 v0.94,43.56
SD_CMD  (via drill 0.3)
  Top 0.152: R3.2 12.8,48.74 12.12,48.06 12.12,39.64 12.24,39.51 12.24,38.68 v12.11,38.54 | v0.89,42.75 1.09,42.75 1.24,42.9 2.37,42.9 U6.77
  Bottom 0.152: v12.11,38.54 11.44,38.54 9.3,36.4 4.35,36.4 3.85,36.9 3.85,39.79 v0.89,42.75
SD_D0  (via drill 0.3)
  Top 0.152: R5.2 24.92,51.13 24.61,51.43 21.62,51.43 21.31,51.74 16.08,51.74 13.89,49.55 v13.89,49.35 | U6.81 1.05,41.73 v0.89,41.88 | v12.07,37.72 12.07,37.75 12.64,38.32 12.64,39.55 12.42,39.77 12.42,47.32 v13.03,47.93
  Bottom 0.152: v0.89,41.88 1.3,41.88 3.55,39.63 3.55,36.78 4.23,36.09 9.42,36.09 11.05,37.72 v12.07,37.72 | v13.03,47.93 13.03,48.49 v13.89,49.35
SD_D1  (via drill 0.3)
  Top 0.152: U6.83 0.88,41.13 v0.83,41.07 | v12.12,36.91 12.12,37.01 12.94,37.84 12.94,39.67 12.73,39.89 12.73,47.01 12.95,47.01 v14.15,48.21 | v14.91,49.55 16.13,50.77 18.76,50.77 R8.2
  Bottom 0.152: v0.83,41.07 1.65,41.07 3.24,39.48 3.24,36.65 4.1,35.79 9.55,35.79 10.67,36.91 v12.12,36.91 | v14.15,48.21 14.15,48.79 v14.91,49.55
SD_D2  (via drill 0.3)
  Top 0.152: U6.87 0.91,39.93 v0.89,39.9 | v13.03,37.06 13.03,37.5 13.25,37.72 13.25,39.8 13.03,40.02 13.03,46.66 14.05,47.68 14.37,47.68 14.88,48.18 v19.28,48.18 | v21.21,49.28 21.54,49.61 R6.2
  Bottom 0.152: v0.89,39.9 2.36,39.9 2.92,39.34 2.92,36.54 3.98,35.48 9.68,35.48 10.64,36.45 11.82,36.45 11.9,36.37 12.34,36.37 v13.03,37.06 | v19.28,48.18 20.37,49.28 v21.21,49.28
SD_D3  (via drill 0.3)
  Top 0.152: U6.89 1.07,39.33 v0.84,39.09 | v13.18,36.2 13.18,36.25 13.64,36.7 v13.64,46.35 13.64,46.51 | v12.12,49.25 12.26,49.25 17.04,54.03 21.4,54.03 R7.2
  Bottom 0.152: v0.84,39.09 2.21,39.09 2.62,38.68 2.62,36.41 3.85,35.18 9.8,35.18 10.67,36.04 13.03,36.04 v13.18,36.2 | v13.64,46.35 13.18,46.35 12.07,47.47 12.07,49.19 v12.12,49.25
SDX_CLK  (via drill 0.35)
  Top 0.152: v8.56,66.37 8.86,66.37 9.12,66.62 U6.10
  Bottom 0.152: J8.5 3.91,60.2 3.53,60.58 3.53,65.56 4.5,66.52 8.41,66.52 v8.56,66.37
SDX_CMD  (via drill 0.35)
  Top 0.152: U6.12 9.07,66.01 8.66,65.61 8.66,65.1 7.09,63.52 7.09,62.87 v6.99,62.76
  Bottom 0.152: J8.3 6.62,62.4 v6.99,62.76
SDX_D0  (via drill 0.35)
  Top 0.152: v7.29,58.6 7.29,62.05 7.54,62.31 7.54,63.37 8.97,64.79 10.17,64.79 U6.16
  Bottom 0.152: J8.7 5.45,58 5.82,57.63 6.32,57.63 v7.29,58.6
SDX_D1  (via drill 0.35)
  Top 0.152: v8.31,58.4 8.31,61.47 8,61.77 8,63.25 8.33,63.57 8.4,63.57 9.07,64.24 10.19,64.24 U6.18
  Bottom 0.152: J8.8 6.81,56.9 v8.31,58.4
SDX_D2  (via drill 0.35)
  Top 0.152: v8.56,63.02 U6.22
  Bottom 0.152: J8.1 6.98,64.6 v8.56,63.02
SDX_D3  (via drill 0.35)
  Top 0.152: v8.56,62.1 8.86,62.2 9.07,62.41 10.18,62.41 U6.24
  Bottom 0.152: J8.2 7.27,63.5 v8.56,62.1
SERVO1  (via drill 0.35)
  Top 0.152: v24.36,36.75 23.95,36.7 20.55,40.11 16.13,40.11 v15.06,41.22 | v6.43,52.5 2.42,52.5 U6.45 | JP1.1 27.69,29.11 27.35,29.11 26.39,30.07 26.39,31.92 v27.91,33.45
  Bottom 0.152: v15.06,41.22 13.94,41.17 8.86,46.25 8.86,50.06 v6.43,52.5 | v24.36,36.75 25.02,36.75 26.41,35.36 26.41,35.15 27.91,33.65 v27.91,33.45
SERVO2  (via drill 0.35)
  Top 0.152: U6.47 6.04,51.93 v6.68,51.28 | v14.96,40.31 15.52,40.26 16.03,39.75 20.29,39.75 v24.05,35.94 | JP1.2 25.53,28.72 25.53,32.14 v26.9,33.5
  Bottom 0.152: v6.68,51.28 7.09,51.28 8.51,49.86 8.51,46.1 13.94,40.66 14.61,40.66 v14.96,40.31 | v24.05,35.94 24.61,35.99 25.32,35.99 26.11,35.21 26.11,35.03 26.9,34.24 v26.9,33.5
SPI_CS0  (via drill 0.35)
  Top 0.152: U6.27 4.12,61.53 4.9,62.31 4.9,63.73 4.9,65.56 7.9,68.56 7.9,71.15 v10.49,73.74
  Bottom 0.152: v10.49,73.74 10.49,72.84 U2.5
SPI_MISO  (via drill 0.3)
  Top 0.152: v11.76,73.79 11.33,73.79 10.72,73.18 10.37,73.18 8.22,71.03 8.22,68.36 5.26,65.41 5.26,62.23 4.25,61.22 3.92,61.22 3.58,60.88 2.44,60.88 U6.29
  Bottom 0.152: U2.6 11.8,73.75 v11.76,73.79
SPI_MOSI  (via drill 0.3)
  Top 0.152: v13.03,73.79 12.73,73.79 11.96,73.03 11,73.03 10.85,72.88 10.51,72.88 8.52,70.89 8.52,68.24 5.56,65.28 5.56,61.65 3.63,59.71 2.41,59.71 U6.33
  Bottom 0.152: U2.7 13.05,73.77 v13.03,73.79
SPI_SCLK  (via drill 0.3)
  Top 0.152: v14.25,73.79 13.94,73.79 12.98,72.82 12.19,72.82 11.94,72.57 10.63,72.57 8.83,70.77 8.83,68.12 5.87,65.15 5.87,61.39 3.63,59.16 2.43,59.16 U6.35
  Bottom 0.152: U2.8 14.3,73.74 v14.25,73.79
UART_RX  (via drill 0.3)
  Top 0.152: U6.53 2.41,50.11 4.14,50.11 5.77,48.49 5.77,34.73 v5.25,34.21
  Bottom 0.152: J9.1 33.91,4.24 10.59,4.24 6.63,8.2 6.48,8.2 4.8,9.88 4.8,12.42 4.19,13.03 2.72,13.03 1.5,14.25 1.5,31.57 4.14,34.21 v5.25,34.21
UART_TX  (via drill 0.3)
  Top 0.152: U6.51 4.09,50.73 6.12,48.69 6.12,48.13 6.17,48.08 6.17,33.81 v5.87,33.5
  Bottom 0.152: J9.2 31.83,4.7 10.8,4.7 5.61,9.88 5.61,11.76 5.56,11.81 5.56,12.42 4.5,13.49 3.18,13.49 2.01,14.66 2.01,30.3 2.06,30.3 | 2.01,30 2.01,30.25 2.06,30.3 | v5.87,33.5 5.56,33.2 4.95,33.2 2.94,31.18 2.06,30.3
USB_D_N  (via drill 0.3)
  Top 0.305: v13.03,17.83 13.03,18.08 20.25,18.08 21.74,16.59 21.74,15.78 J4.2 | v4.45,15.75 4.45,16 3.61,16 3.53,15.93 U6.167 | U6.167
  Bottom 0.305: v13.03,17.83 13.03,18.08 7.74,18.08 7.22,17.57 arc90 7.22,17.24 7.33,17.14 arc-90 7.33,16.81 6.61,16.09 arc-90 6.28,16.09 6.18,16.2 arc90 5.85,16.2 5.66,16 4.45,16 v4.45,15.75
USB_D_P  (via drill 0.3)
  Top 0.305: v13.03,18.8 13.03,18.54 20.44,18.54 22.2,16.78 22.2,16.56 22.48,16.28 v22.53,16.13 | v4.45,16.71 4.45,16.46 3.45,16.46 3.38,16.53 2.41,16.53 U6.165
  Bottom 0.305: v13.03,18.8 13.03,18.54 7.55,18.54 5.47,16.46 4.45,16.46 v4.45,16.71 | v22.53,16.13 22.48,15.91 J4.3

## Text on the board
tPlace: U9
bPlace: U11 | U2 | J8 | M1 | U8 | S2 | S1 | M4 | J9 | J4 | POWER
tNames: Central Board v2 | SensA | Batt | SDA | SCL
bNames: PID | 5V | Gimb | SensB | U4